# EAGLE board oresat-backplane (EAGLE 9.1.3)
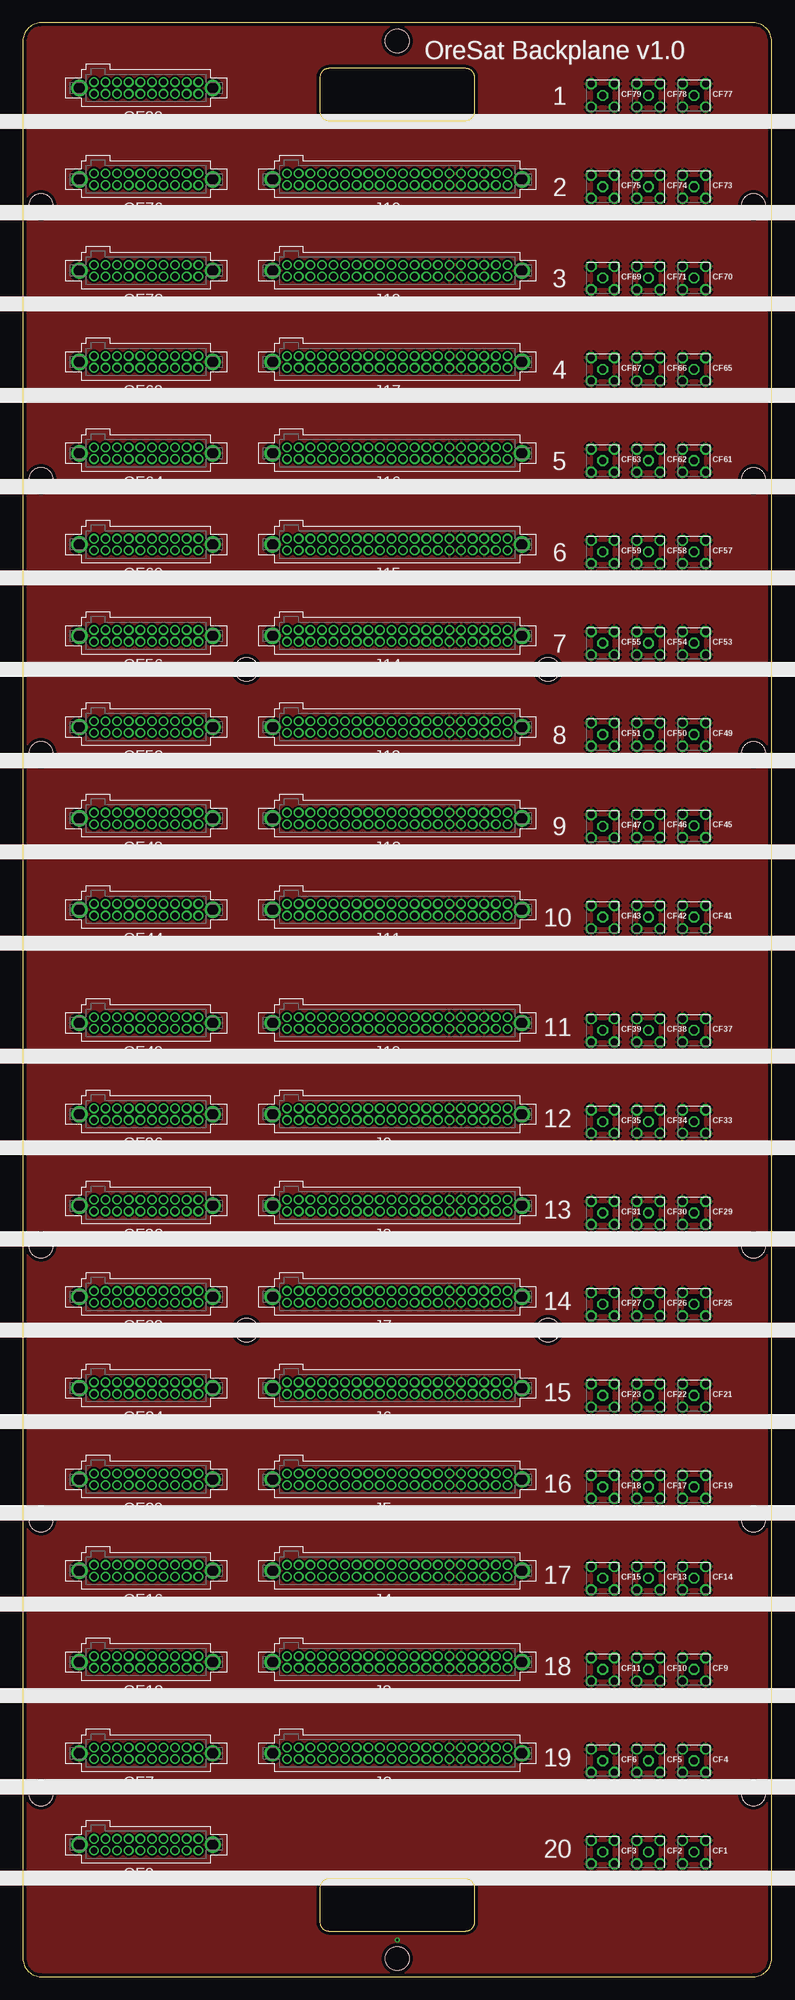
[diagram p0: board, top side]
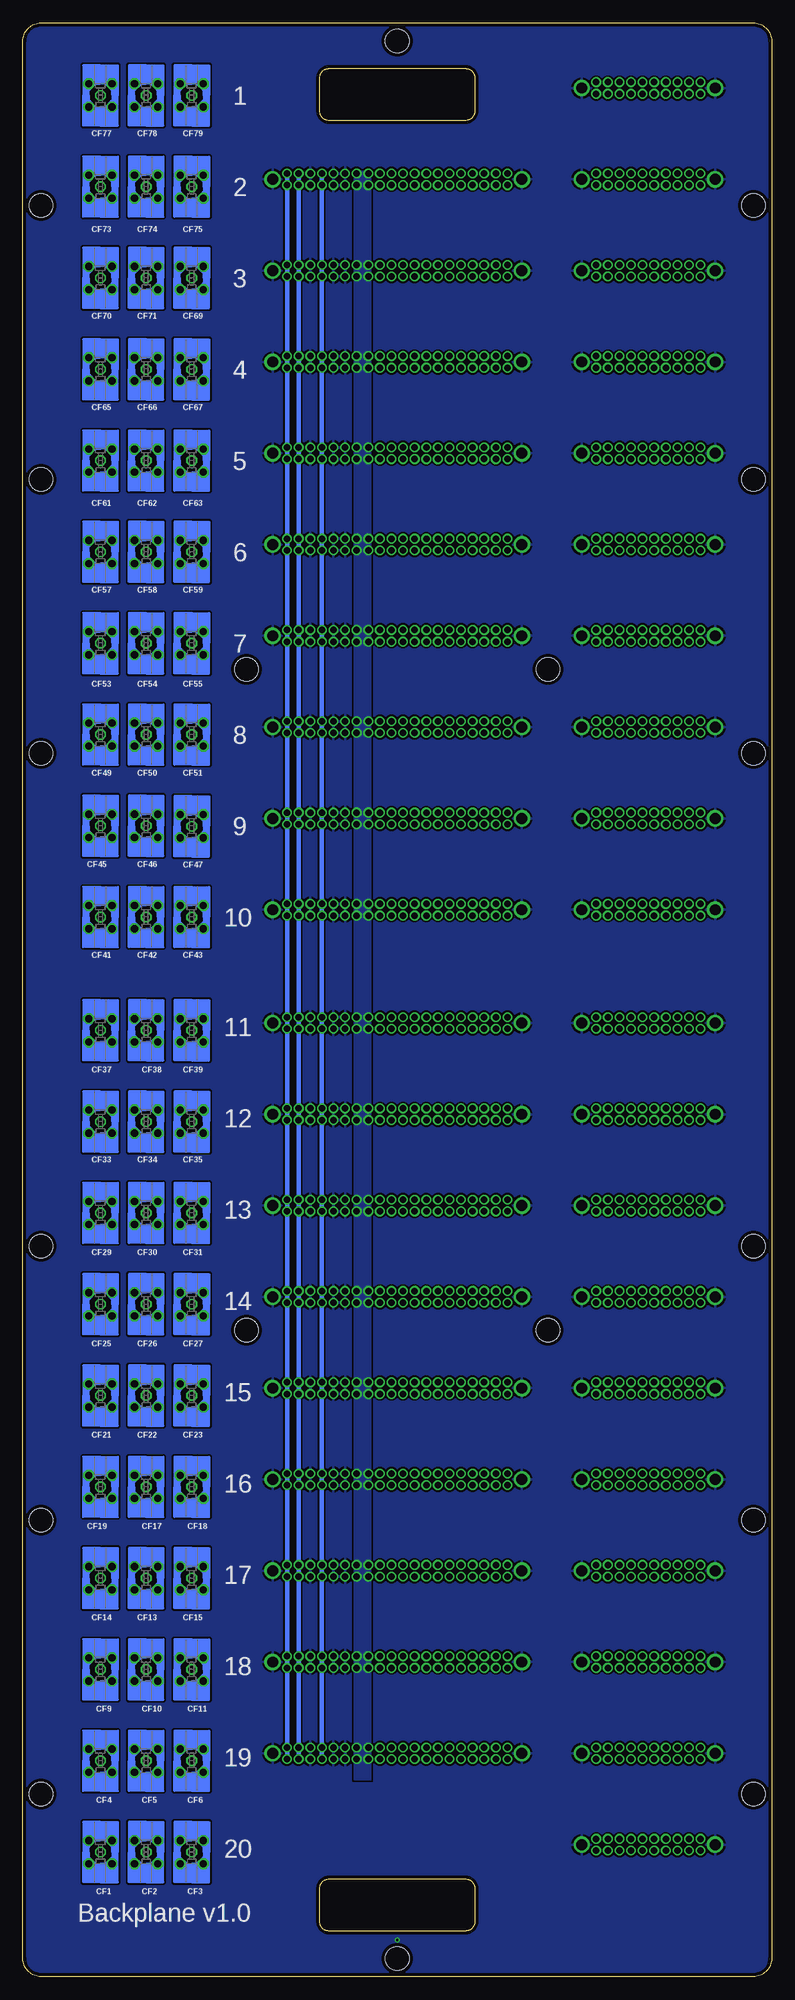
[diagram p1: board, bottom side, seen from below]

Size 82 x 214 mm. Coordinates in mm from the lower left corner, seen from the top.
Outline: 0,212 0,2 arc90 2,0 80,0 arc90 82,2 82,212 arc90 80,214 2,214 arc90 0,212
Outline: 48.48,10.7 33.52,10.7 arc90 32.52,9.7 32.52,6 arc90 33.52,5 48.48,5 arc90 49.48,6 49.48,9.7 arc90 48.48,10.7
Outline: 32.52,208 32.52,204.3 arc90 33.52,203.3 48.48,203.3 arc90 49.48,204.3 49.48,208 arc90 48.48,209 33.52,209 arc90 32.52,208
Copper layers (1*16): Top 0.035559375mm / dielectric 1.6mm / Bottom 0.035559375mm
Design rules "oshpark-2layer-tented": minimum track width 6mil, minimum drill 10mil, track to track 6mil, track to pad 6mil, pad to pad 6mil, via to via 6mil, smd to smd 6mil, copper to edge 15mil, drill to drill 6mil, minimum pad ring 5mil, minimum via ring 5mil, stop-mask expansion 2.5mil, vias tented up to drill 20mil, thermal gap 10mil
Holes 2.6 mm at 2,20 2,50 2,80 2,134 2,164 2,194 80,20 80,50 80,80 80,134 80,164 80,194 41,2 41,212 24.5,70.8 57.5,70.8 24.5,143.2 57.5,143.2

## Footprints (pad centres in the part's own frame; a part is rotated, then mirrored left to right if it is on the bottom)
TEST = drill 0.787 octagon: 1 0,0; GND@1 -1.27,1.27; GND@2 1.27,1.27; GND@3 1.27,-1.27; GND@4 -1.27,-1.27
SFM-110-X1-XXX-D-LC = drill 0.711 pad 1.067: 1 5.715,-0.635; 2 5.715,0.635; 3 4.445,-0.635; 4 4.445,0.635; 5 3.175,-0.635; 6 3.175,0.635; 7 1.905,-0.635; 8 1.905,0.635; 9 0.635,-0.635; 10 0.635,0.635; 11 -0.635,-0.635; 12 -0.635,0.635; 13 -1.905,-0.635; 14 -1.905,0.635; 15 -3.175,-0.635; 16 -3.175,0.635; 17 -4.445,-0.635; 18 -4.445,0.635; 19 -5.715,-0.635; 20 -5.715,0.635 | drill 1.194: LC1 7.303,0; LC2 -7.303,0
SFM-120-X1-XXX-D = drill 0.711 pad 1.067: 1 12.065,-0.635; 2 12.065,0.635; 3 10.795,-0.635; 4 10.795,0.635; 5 9.525,-0.635; 6 9.525,0.635; 7 8.255,-0.635; 8 8.255,0.635; 9 6.985,-0.635; 10 6.985,0.635; 11 5.715,-0.635; 12 5.715,0.635; 13 4.445,-0.635; 14 4.445,0.635; 15 3.175,-0.635; 16 3.175,0.635; 17 1.905,-0.635; 18 1.905,0.635; 19 0.635,-0.635; 20 0.635,0.635; 21 -0.635,-0.635; 22 -0.635,0.635; 23 -1.905,-0.635; 24 -1.905,0.635; 25 -3.175,-0.635; 26 -3.175,0.635; 27 -4.445,-0.635; 28 -4.445,0.635; 29 -5.715,-0.635; 30 -5.715,0.635; 31 -6.985,-0.635; 32 -6.985,0.635; 33 -8.255,-0.635; 34 -8.255,0.635; 35 -9.525,-0.635; 36 -9.525,0.635; 37 -10.795,-0.635; 38 -10.795,0.635; 39 -12.065,-0.635; 40 -12.065,0.635 | drill 1.194: LC1 13.652,0; LC2 -13.652,0

## Placement (x,y rotation side)
CF1  ORESAT-BACKPLANE-TO-UT-047  [TEST]  73.5,13.65 0 top
CF2  ORESAT-BACKPLANE-TO-UT-047  [TEST]  68.5,13.65 0 top
CF3  ORESAT-BACKPLANE-TO-UT-047  [TEST]  63.5,13.65 0 top
CF4  ORESAT-BACKPLANE-TO-UT-047  [TEST]  73.5,23.65 0 top
CF5  ORESAT-BACKPLANE-TO-UT-047  [TEST]  68.5,23.65 0 top
CF6  ORESAT-BACKPLANE-TO-UT-047  [TEST]  63.5,23.65 0 top
CF7  SFM-110-X1-XXX-D-LC  [SFM-110-X1-XXX-D-LC]  13.5,24.46 0 top
CF8  SFM-110-X1-XXX-D-LC  [SFM-110-X1-XXX-D-LC]  13.5,14.46 0 top
CF9  ORESAT-BACKPLANE-TO-UT-047  [TEST]  73.5,33.65 0 top
CF10  ORESAT-BACKPLANE-TO-UT-047  [TEST]  68.5,33.65 0 top
CF11  ORESAT-BACKPLANE-TO-UT-047  [TEST]  63.5,33.65 0 top
CF12  SFM-110-X1-XXX-D-LC  [SFM-110-X1-XXX-D-LC]  13.5,34.46 0 top
CF13  ORESAT-BACKPLANE-TO-UT-047  [TEST]  68.5,43.65 0 top
CF14  ORESAT-BACKPLANE-TO-UT-047  [TEST]  73.5,43.65 0 top
CF15  ORESAT-BACKPLANE-TO-UT-047  [TEST]  63.5,43.65 0 top
CF16  SFM-110-X1-XXX-D-LC  [SFM-110-X1-XXX-D-LC]  13.5,44.46 0 top
CF17  ORESAT-BACKPLANE-TO-UT-047  [TEST]  68.5,53.65 0 top
CF18  ORESAT-BACKPLANE-TO-UT-047  [TEST]  63.5,53.65 0 top
CF19  ORESAT-BACKPLANE-TO-UT-047  [TEST]  73.5,53.65 0 top
CF20  SFM-110-X1-XXX-D-LC  [SFM-110-X1-XXX-D-LC]  13.5,54.46 0 top
CF21  ORESAT-BACKPLANE-TO-UT-047  [TEST]  73.5,63.65 0 top
CF22  ORESAT-BACKPLANE-TO-UT-047  [TEST]  68.5,63.65 0 top
CF23  ORESAT-BACKPLANE-TO-UT-047  [TEST]  63.5,63.65 0 top
CF24  SFM-110-X1-XXX-D-LC  [SFM-110-X1-XXX-D-LC]  13.5,64.46 0 top
CF25  ORESAT-BACKPLANE-TO-UT-047  [TEST]  73.5,73.65 0 top
CF26  ORESAT-BACKPLANE-TO-UT-047  [TEST]  68.5,73.65 0 top
CF27  ORESAT-BACKPLANE-TO-UT-047  [TEST]  63.5,73.65 0 top
CF28  SFM-110-X1-XXX-D-LC  [SFM-110-X1-XXX-D-LC]  13.5,74.46 0 top
CF29  ORESAT-BACKPLANE-TO-UT-047  [TEST]  73.5,83.65 0 top
CF30  ORESAT-BACKPLANE-TO-UT-047  [TEST]  68.5,83.65 0 top
CF31  ORESAT-BACKPLANE-TO-UT-047  [TEST]  63.5,83.65 0 top
CF32  SFM-110-X1-XXX-D-LC  [SFM-110-X1-XXX-D-LC]  13.5,84.46 0 top
CF33  ORESAT-BACKPLANE-TO-UT-047  [TEST]  73.5,93.65 0 top
CF34  ORESAT-BACKPLANE-TO-UT-047  [TEST]  68.5,93.65 0 top
CF35  ORESAT-BACKPLANE-TO-UT-047  [TEST]  63.5,93.65 0 top
CF36  SFM-110-X1-XXX-D-LC  [SFM-110-X1-XXX-D-LC]  13.5,94.46 0 top
CF37  ORESAT-BACKPLANE-TO-UT-047  [TEST]  73.5,103.65 0 top
CF38  ORESAT-BACKPLANE-TO-UT-047  [TEST]  68.5,103.65 0 top
CF39  ORESAT-BACKPLANE-TO-UT-047  [TEST]  63.5,103.65 0 top
CF40  SFM-110-X1-XXX-D-LC  [SFM-110-X1-XXX-D-LC]  13.5,104.46 0 top
CF41  ORESAT-BACKPLANE-TO-UT-047  [TEST]  73.5,116.05 0 top
CF42  ORESAT-BACKPLANE-TO-UT-047  [TEST]  68.5,116.05 0 top
CF43  ORESAT-BACKPLANE-TO-UT-047  [TEST]  63.5,116.05 0 top
CF44  SFM-110-X1-XXX-D-LC  [SFM-110-X1-XXX-D-LC]  13.5,116.86 0 top
CF45  ORESAT-BACKPLANE-TO-UT-047  [TEST]  73.5,126.05 0 top
CF46  ORESAT-BACKPLANE-TO-UT-047  [TEST]  68.5,126.05 0 top
CF47  ORESAT-BACKPLANE-TO-UT-047  [TEST]  63.5,126 0 top
CF48  SFM-110-X1-XXX-D-LC  [SFM-110-X1-XXX-D-LC]  13.5,126.86 0 top
CF49  ORESAT-BACKPLANE-TO-UT-047  [TEST]  73.5,136.05 0 top
CF50  ORESAT-BACKPLANE-TO-UT-047  [TEST]  68.5,136.05 0 top
CF51  ORESAT-BACKPLANE-TO-UT-047  [TEST]  63.5,136.05 0 top
CF52  SFM-110-X1-XXX-D-LC  [SFM-110-X1-XXX-D-LC]  13.5,136.86 0 top
CF53  ORESAT-BACKPLANE-TO-UT-047  [TEST]  73.5,146.05 0 top
CF54  ORESAT-BACKPLANE-TO-UT-047  [TEST]  68.5,146.05 0 top
CF55  ORESAT-BACKPLANE-TO-UT-047  [TEST]  63.5,146.05 0 top
CF56  SFM-110-X1-XXX-D-LC  [SFM-110-X1-XXX-D-LC]  13.5,146.86 0 top
CF57  ORESAT-BACKPLANE-TO-UT-047  [TEST]  73.5,156.05 0 top
CF58  ORESAT-BACKPLANE-TO-UT-047  [TEST]  68.5,156.05 0 top
CF59  ORESAT-BACKPLANE-TO-UT-047  [TEST]  63.5,156.05 0 top
CF60  SFM-110-X1-XXX-D-LC  [SFM-110-X1-XXX-D-LC]  13.5,156.86 0 top
CF61  ORESAT-BACKPLANE-TO-UT-047  [TEST]  73.5,166.05 0 top
CF62  ORESAT-BACKPLANE-TO-UT-047  [TEST]  68.5,166.05 0 top
CF63  ORESAT-BACKPLANE-TO-UT-047  [TEST]  63.5,166.05 0 top
CF64  SFM-110-X1-XXX-D-LC  [SFM-110-X1-XXX-D-LC]  13.5,166.86 0 top
CF65  ORESAT-BACKPLANE-TO-UT-047  [TEST]  73.5,176.05 0 top
CF66  ORESAT-BACKPLANE-TO-UT-047  [TEST]  68.5,176.05 0 top
CF67  ORESAT-BACKPLANE-TO-UT-047  [TEST]  63.5,176.05 0 top
CF68  SFM-110-X1-XXX-D-LC  [SFM-110-X1-XXX-D-LC]  13.5,176.86 0 top
CF69  ORESAT-BACKPLANE-TO-UT-047  [TEST]  63.5,186.05 0 top
CF70  ORESAT-BACKPLANE-TO-UT-047  [TEST]  73.5,186.05 0 top
CF71  ORESAT-BACKPLANE-TO-UT-047  [TEST]  68.5,186.05 0 top
CF72  SFM-110-X1-XXX-D-LC  [SFM-110-X1-XXX-D-LC]  13.5,186.86 0 top
CF73  ORESAT-BACKPLANE-TO-UT-047  [TEST]  73.5,196.05 0 top
CF74  ORESAT-BACKPLANE-TO-UT-047  [TEST]  68.5,196.05 0 top
CF75  ORESAT-BACKPLANE-TO-UT-047  [TEST]  63.5,196.05 0 top
CF76  SFM-110-X1-XXX-D-LC  [SFM-110-X1-XXX-D-LC]  13.5,196.86 0 top
CF77  ORESAT-BACKPLANE-TO-UT-047  [TEST]  73.5,206.05 0 top
CF78  ORESAT-BACKPLANE-TO-UT-047  [TEST]  68.5,206.05 0 top
CF79  ORESAT-BACKPLANE-TO-UT-047  [TEST]  63.5,206.05 0 top
CF80  SFM-110-X1-XXX-D-LC  [SFM-110-X1-XXX-D-LC]  13.5,206.86 0 top
J2  SFM-120-X1-XXX-D  [SFM-120-X1-XXX-D]  41,24.46 0 top
J3  SFM-120-X1-XXX-D  [SFM-120-X1-XXX-D]  41,34.46 0 top
J4  SFM-120-X1-XXX-D  [SFM-120-X1-XXX-D]  41,44.46 0 top
J5  SFM-120-X1-XXX-D  [SFM-120-X1-XXX-D]  41,54.46 0 top
J6  SFM-120-X1-XXX-D  [SFM-120-X1-XXX-D]  41,64.46 0 top
J7  SFM-120-X1-XXX-D  [SFM-120-X1-XXX-D]  41,74.46 0 top
J8  SFM-120-X1-XXX-D  [SFM-120-X1-XXX-D]  41,84.46 0 top
J9  SFM-120-X1-XXX-D  [SFM-120-X1-XXX-D]  41,94.46 0 top
J10  SFM-120-X1-XXX-D  [SFM-120-X1-XXX-D]  41,104.46 0 top
J11  SFM-120-X1-XXX-D  [SFM-120-X1-XXX-D]  41,116.86 0 top
J12  SFM-120-X1-XXX-D  [SFM-120-X1-XXX-D]  41,126.86 0 top
J13  SFM-120-X1-XXX-D  [SFM-120-X1-XXX-D]  41,136.86 0 top
J14  SFM-120-X1-XXX-D  [SFM-120-X1-XXX-D]  41,146.86 0 top
J15  SFM-120-X1-XXX-D  [SFM-120-X1-XXX-D]  41,156.86 0 top
J16  SFM-120-X1-XXX-D  [SFM-120-X1-XXX-D]  41,166.86 0 top
J17  SFM-120-X1-XXX-D  [SFM-120-X1-XXX-D]  41,176.86 0 top
J18  SFM-120-X1-XXX-D  [SFM-120-X1-XXX-D]  41,186.86 0 top
J19  SFM-120-X1-XXX-D  [SFM-120-X1-XXX-D]  41,196.86 0 top

## Library data of the parts
CF1-CF6 CF9-CF11 CF13-CF15 CF17-CF19 CF21-CF23 CF25-CF27 CF29-CF31 CF33-CF35 CF37-CF39 CF41-CF43 CF45-CF47 CF49-CF51 CF53-CF55 CF57-CF59 CF61-CF63 CF65-CF67 CF69-CF71 CF73-CF75 CF77-CF79 = J-Cinch-MMCX-135-3701-211-to-UT-047
CF7 CF8 CF12 CF16 CF20 CF24 CF28 CF32 CF36 CF40 CF44 CF48 CF52 CF56 CF60 CF64 CF68 CF72 CF76 CF80 = J-Samtec-SFM-110-X1-XXX-D-LC
J2-J19 = J-Samtec-SFM-120-X1-XXX-D

## Nets
!SHUTDOWN: J2.7 J2.8 J3.7 J3.8 J4.7 J4.8 J5.7 J5.8 J6.7 J6.8 J7.7 J7.8 J8.7 J8.8 J9.7 J9.8 J10.7 J10.8 J11.7 J11.8 J12.7 J12.8 J13.7 J13.8 J14.7 J14.8 J15.7 J15.8 J16.7 J16.8 J17.7 J17.8 J18.7 J18.8 J19.7 J19.8
CAN_H: J2.3 J2.4 J3.3 J3.4 J4.3 J4.4 J5.3 J5.4 J6.3 J6.4 J7.3 J7.4 J8.3 J8.4 J9.3 J9.4 J10.3 J10.4 J11.3 J11.4 J12.3 J12.4 J13.3 J13.4 J14.3 J14.4 J15.3 J15.4 J16.3 J16.4 J17.3 J17.4 J18.3 J18.4 J19.3 J19.4
CAN_L: J2.1 J2.2 J3.1 J3.2 J4.1 J4.2 J5.1 J5.2 J6.1 J6.2 J7.1 J7.2 J8.1 J8.2 J9.1 J9.2 J10.1 J10.2 J11.1 J11.2 J12.1 J12.2 J13.1 J13.2 J14.1 J14.2 J15.1 J15.2 J16.1 J16.2 J17.1 J17.2 J18.1 J18.2 J19.1 J19.2
GND: CF1.GND@1 CF1.GND@2 CF1.GND@3 CF1.GND@4 CF2.GND@1 CF2.GND@2 CF2.GND@3 CF2.GND@4 CF3.GND@1 CF3.GND@2 CF3.GND@3 CF3.GND@4 CF4.GND@1 CF4.GND@2 CF4.GND@3 CF4.GND@4 CF5.GND@1 CF5.GND@2 CF5.GND@3 CF5.GND@4 CF6.GND@1 CF6.GND@2 CF6.GND@3 CF6.GND@4 CF7.LC1 CF7.LC2 CF8.LC1 CF8.LC2 CF9.GND@1 CF9.GND@2 CF9.GND@3 CF9.GND@4 CF10.GND@1 CF10.GND@2 CF10.GND@3 CF10.GND@4 CF11.GND@1 CF11.GND@2 CF11.GND@3 CF11.GND@4 CF12.LC1 CF12.LC2 CF13.GND@1 CF13.GND@2 CF13.GND@3 CF13.GND@4 CF14.GND@1 CF14.GND@2 CF14.GND@3 CF14.GND@4 CF15.GND@1 CF15.GND@2 CF15.GND@3 CF15.GND@4 CF16.LC1 CF16.LC2 CF17.GND@1 CF17.GND@2 CF17.GND@3 CF17.GND@4 CF18.GND@1 CF18.GND@2 CF18.GND@3 CF18.GND@4 CF19.GND@1 CF19.GND@2 CF19.GND@3 CF19.GND@4 CF20.LC1 CF20.LC2 CF21.GND@1 CF21.GND@2 CF21.GND@3 CF21.GND@4 CF22.GND@1 CF22.GND@2 CF22.GND@3 CF22.GND@4 CF23.GND@1 CF23.GND@2 CF23.GND@3 CF23.GND@4 CF24.LC1 CF24.LC2 CF25.GND@1 CF25.GND@2 CF25.GND@3 CF25.GND@4 CF26.GND@1 CF26.GND@2 CF26.GND@3 CF26.GND@4 CF27.GND@1 CF27.GND@2 CF27.GND@3 CF27.GND@4 CF28.LC1 CF28.LC2 CF29.GND@1 CF29.GND@2 CF29.GND@3 CF29.GND@4 CF30.GND@1 CF30.GND@2 CF30.GND@3 CF30.GND@4 CF31.GND@1 CF31.GND@2 CF31.GND@3 CF31.GND@4 CF32.LC1 CF32.LC2 CF33.GND@1 CF33.GND@2 CF33.GND@3 CF33.GND@4 CF34.GND@1 CF34.GND@2 CF34.GND@3 CF34.GND@4 CF35.GND@1 CF35.GND@2 CF35.GND@3 CF35.GND@4 CF36.LC1 CF36.LC2 CF37.GND@1 CF37.GND@2 CF37.GND@3 CF37.GND@4 CF38.GND@1 CF38.GND@2 CF38.GND@3 CF38.GND@4 CF39.GND@1 CF39.GND@2 CF39.GND@3 CF39.GND@4 CF40.LC1 CF40.LC2 CF41.GND@1 CF41.GND@2 CF41.GND@3 CF41.GND@4 CF42.GND@1 CF42.GND@2 CF42.GND@3 CF42.GND@4 CF43.GND@1 CF43.GND@2 CF43.GND@3 CF43.GND@4 CF44.LC1 CF44.LC2 CF45.GND@1 CF45.GND@2 CF45.GND@3 CF45.GND@4 CF46.GND@1 CF46.GND@2 CF46.GND@3 CF46.GND@4 CF47.GND@1 CF47.GND@2 CF47.GND@3 CF47.GND@4 CF48.LC1 CF48.LC2 CF49.GND@1 CF49.GND@2 CF49.GND@3 CF49.GND@4 CF50.GND@1 CF50.GND@2 CF50.GND@3 CF50.GND@4 CF51.GND@1 CF51.GND@2 CF51.GND@3 CF51.GND@4 CF52.LC1 CF52.LC2 CF53.GND@1 CF53.GND@2 CF53.GND@3 CF53.GND@4 CF54.GND@1 CF54.GND@2 CF54.GND@3 CF54.GND@4 CF55.GND@1 CF55.GND@2 CF55.GND@3 CF55.GND@4 CF56.LC1 CF56.LC2 CF57.GND@1 CF57.GND@2 CF57.GND@3 CF57.GND@4 CF58.GND@1 CF58.GND@2 CF58.GND@3 CF58.GND@4 CF59.GND@1 CF59.GND@2 CF59.GND@3 CF59.GND@4 CF60.LC1 CF60.LC2 CF61.GND@1 CF61.GND@2 CF61.GND@3 CF61.GND@4 CF62.GND@1 CF62.GND@2 CF62.GND@3 CF62.GND@4 CF63.GND@1 CF63.GND@2 CF63.GND@3 CF63.GND@4 CF64.LC1 CF64.LC2 CF65.GND@1 CF65.GND@2 CF65.GND@3 CF65.GND@4 CF66.GND@1 CF66.GND@2 CF66.GND@3 CF66.GND@4 CF67.GND@1 CF67.GND@2 CF67.GND@3 CF67.GND@4 CF68.LC1 CF68.LC2 CF69.GND@1 CF69.GND@2 CF69.GND@3 CF69.GND@4 CF70.GND@1 CF70.GND@2 CF70.GND@3 CF70.GND@4 CF71.GND@1 CF71.GND@2 CF71.GND@3 CF71.GND@4 CF72.LC1 CF72.LC2 CF73.GND@1 CF73.GND@2 CF73.GND@3 CF73.GND@4 CF74.GND@1 CF74.GND@2 CF74.GND@3 CF74.GND@4 CF75.GND@1 CF75.GND@2 CF75.GND@3 CF75.GND@4 CF76.LC1 CF76.LC2 CF77.GND@1 CF77.GND@2 CF77.GND@3 CF77.GND@4 CF78.GND@1 CF78.GND@2 CF78.GND@3 CF78.GND@4 CF79.GND@1 CF79.GND@2 CF79.GND@3 CF79.GND@4 CF80.LC1 CF80.LC2 J2.5 J2.6 J2.9 J2.10 J2.11 J2.12 J2.LC1 J2.LC2 J3.5 J3.6 J3.9 J3.10 J3.11 J3.12 J3.LC1 J3.LC2 J4.5 J4.6 J4.9 J4.10 J4.11 J4.12 J4.LC1 J4.LC2 J5.5 J5.6 J5.9 J5.10 J5.11 J5.12 J5.LC1 J5.LC2 J6.5 J6.6 J6.9 J6.10 J6.11 J6.12 J6.LC1 J6.LC2 J7.5 J7.6 J7.9 J7.10 J7.11 J7.12 J7.LC1 J7.LC2 J8.5 J8.6 J8.9 J8.10 J8.11 J8.12 J8.LC1 J8.LC2 J9.5 J9.6 J9.9 J9.10 J9.11 J9.12 J9.LC1 J9.LC2 J10.5 J10.6 J10.9 J10.10 J10.11 J10.12 J10.LC1 J10.LC2 J11.5 J11.6 J11.9 J11.10 J11.11 J11.12 J11.LC1 J11.LC2 J12.5 J12.6 J12.9 J12.10 J12.11 J12.12 J12.LC1 J12.LC2 J13.5 J13.6 J13.9 J13.10 J13.11 J13.12 J13.LC1 J13.LC2 J14.5 J14.6 J14.9 J14.10 J14.11 J14.12 J14.LC1 J14.LC2 J15.5 J15.6 J15.9 J15.10 J15.11 J15.12 J15.LC1 J15.LC2 J16.5 J16.6 J16.9 J16.10 J16.11 J16.12 J16.LC1 J16.LC2 J17.5 J17.6 J17.9 J17.10 J17.11 J17.12 J17.LC1 J17.LC2 J18.5 J18.6 J18.9 J18.10 J18.11 J18.12 J18.LC1 J18.LC2 J19.5 J19.6 J19.9 J19.10 J19.11 J19.12 J19.LC1 J19.LC2
VBUS: J2.13 J2.14 J2.15 J2.16 J3.13 J3.14 J3.15 J3.16 J4.13 J4.14 J4.15 J4.16 J5.13 J5.14 J5.15 J5.16 J6.13 J6.14 J6.15 J6.16 J7.13 J7.14 J7.15 J7.16 J8.13 J8.14 J8.15 J8.16 J9.13 J9.14 J9.15 J9.16 J10.13 J10.14 J10.15 J10.16 J11.13 J11.14 J11.15 J11.16 J12.13 J12.14 J12.15 J12.16 J13.13 J13.14 J13.15 J13.16 J14.13 J14.14 J14.15 J14.16 J15.13 J15.14 J15.15 J15.16 J16.13 J16.14 J16.15 J16.16 J17.13 J17.14 J17.15 J17.16 J18.13 J18.14 J18.15 J18.16 J19.13 J19.14 J19.15 J19.16

## Tracks (layer width: path | path; a pad name or v marks a point on that pad's centre or on a via)
!SHUTDOWN
  Bottom 0.5: J2.7 J2.8 J3.7 J3.8 J4.7 J4.8 J5.7 J5.8 J6.7 J6.8 J7.7 J7.8 J8.7 J8.8 J9.7 J9.8 J10.7 J10.8 J11.7 J11.8 J12.7 J12.8 J13.7 J13.8 J14.7 J14.8 J15.7 J15.8 J16.7 J16.8 J17.7 J17.8 J18.7 J18.8 J19.7 J19.8
CAN_H
  Bottom 0.5: J2.3 J2.4 J3.3 J3.4 J4.3 J4.4 J5.3 J5.4 J6.3 J6.4 J7.3 J7.4 J8.3 J8.4 J9.3 J9.4 J10.3 J10.4 J11.3 J11.4 J12.3 J12.4 J13.3 J13.4 J14.3 J14.4 J15.3 J15.4 J16.3 J16.4 J17.3 J17.4 J18.3 J18.4 J19.3 J19.4
CAN_L
  Bottom 0.5: J2.1 J2.2 J3.1 J3.2 J4.1 J4.2 J5.1 J5.2 J6.1 J6.2 J7.1 J7.2 J8.1 J8.2 J9.1 J9.2 J10.1 J10.2 J11.1 J11.2 J12.1 J12.2 J13.1 J13.2 J14.1 J14.2 J15.1 J15.2 J16.1 J16.2 J17.1 J17.2 J18.1 J18.2 J19.1 J19.2
GND  (via drill 0.25)
  other vias: 41,4
  pour Top (isolate 0.2, rank 6): 0,0 0,214 82,214 82,0
  pour Bottom (isolate 0.2, rank 6): 0,0 0,214 82,214 82,0
VBUS
  pour Bottom (no thermals): 45.5,21.6 43.9,21.6 43.9,197.7 45.7,197.7 45.7,21.6

## Text on the board
tPlace: OreSat Backplane v1.0 | OreSat Backplane v1.0 | 1 | 2 | 3 | 4 | 5 | 6 | 7 | 8 | 9 | 10 | 11 | 12 | 13 | 14 | 15 | 16 | 17 | 18 | 19 | 20
bPlace: 1 | 2 | 3 | 4 | 5 | 6 | 7 | 8 | 9 | 10 | 11 | 12 | 13 | 14 | 15 | 16 | 17 | 18 | 19 | 20 | Backplane v1.0